# Altium PCB PCB1.PcbDoc
Units mm, origin at the board's own origin, x right, y up, seen from the top; angles counter-clockwise.
Board outline 51.75 x 40 mm, 4 copper layers (Component Side, Ground Plane, Power Plane, Solder Side), stack 0.844 mm thick; 2 components, 70 nets, 124 pads, 2 vias.
Unrouted connection lines stored in the file: 22.
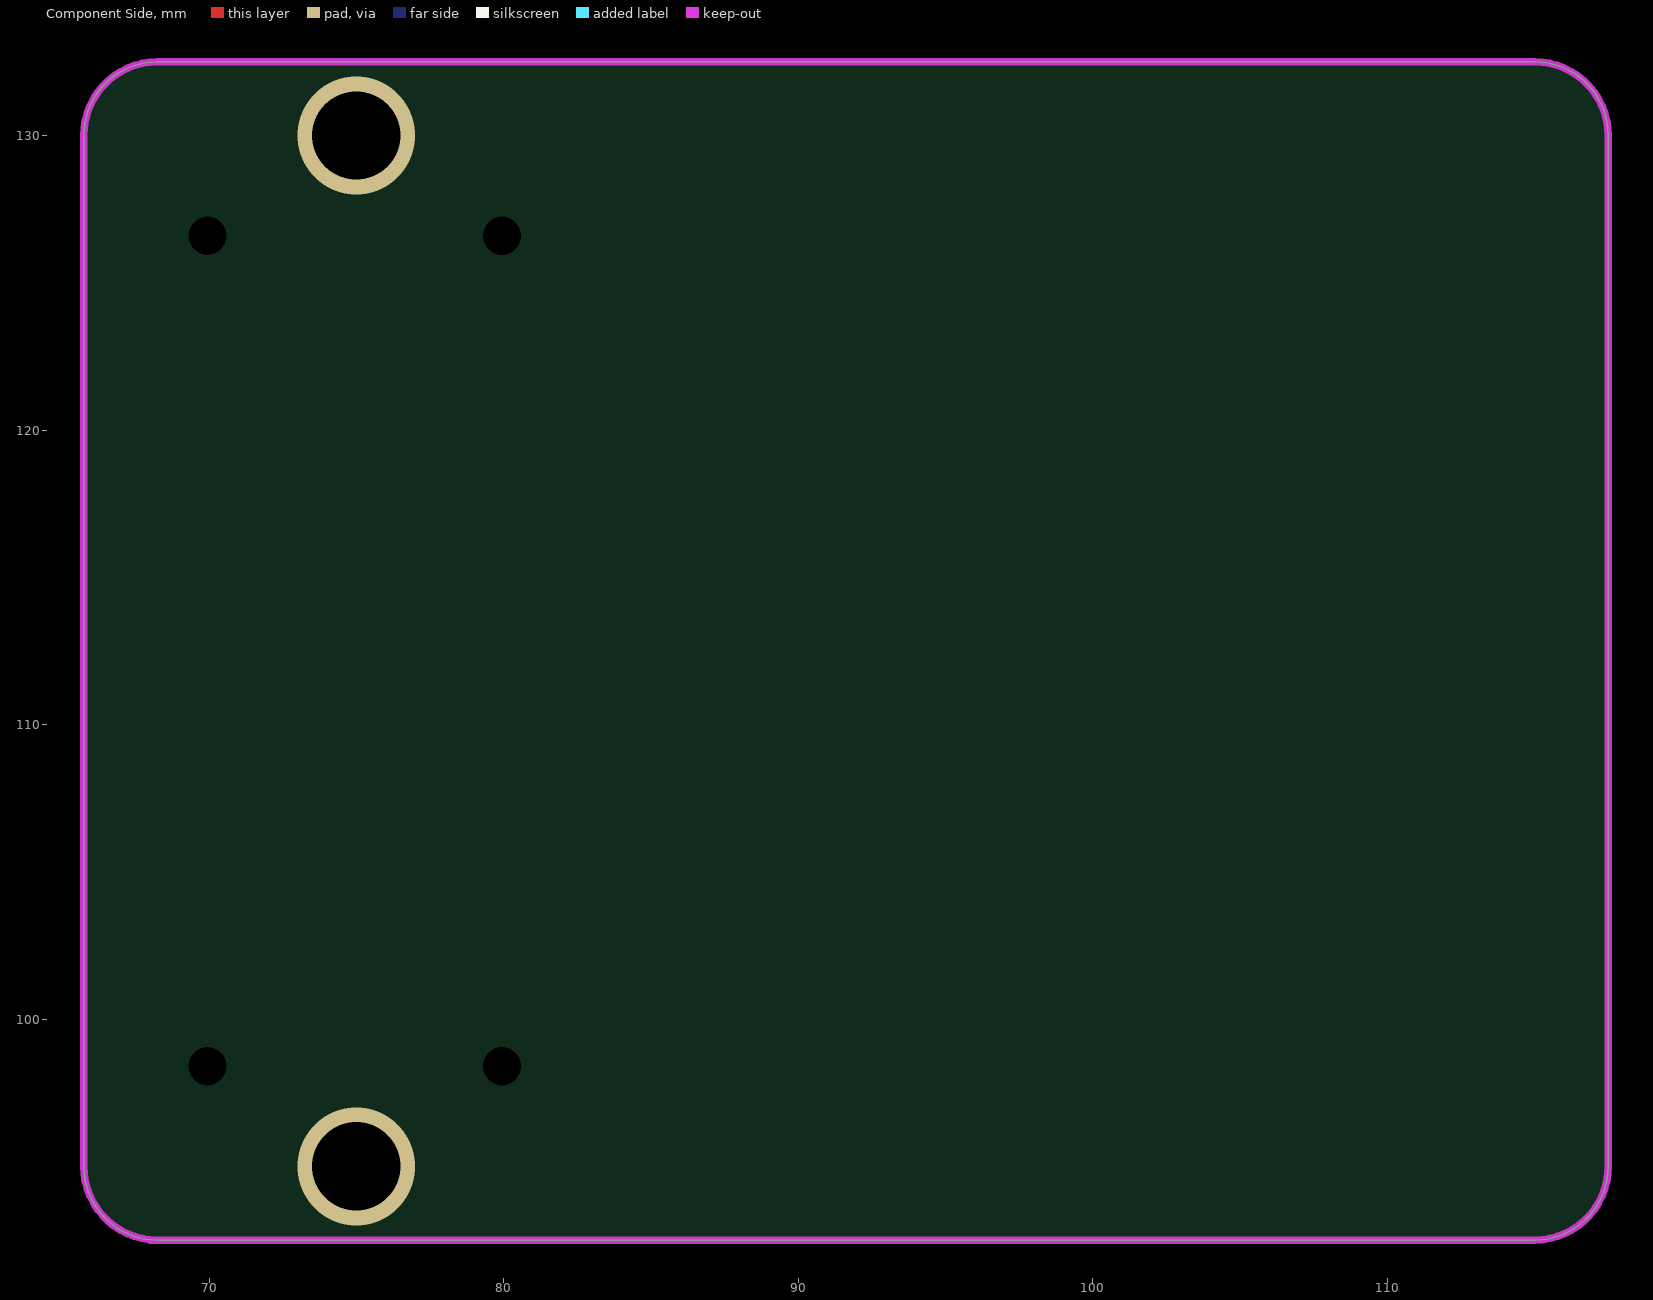
[diagram p0: Component Side view]
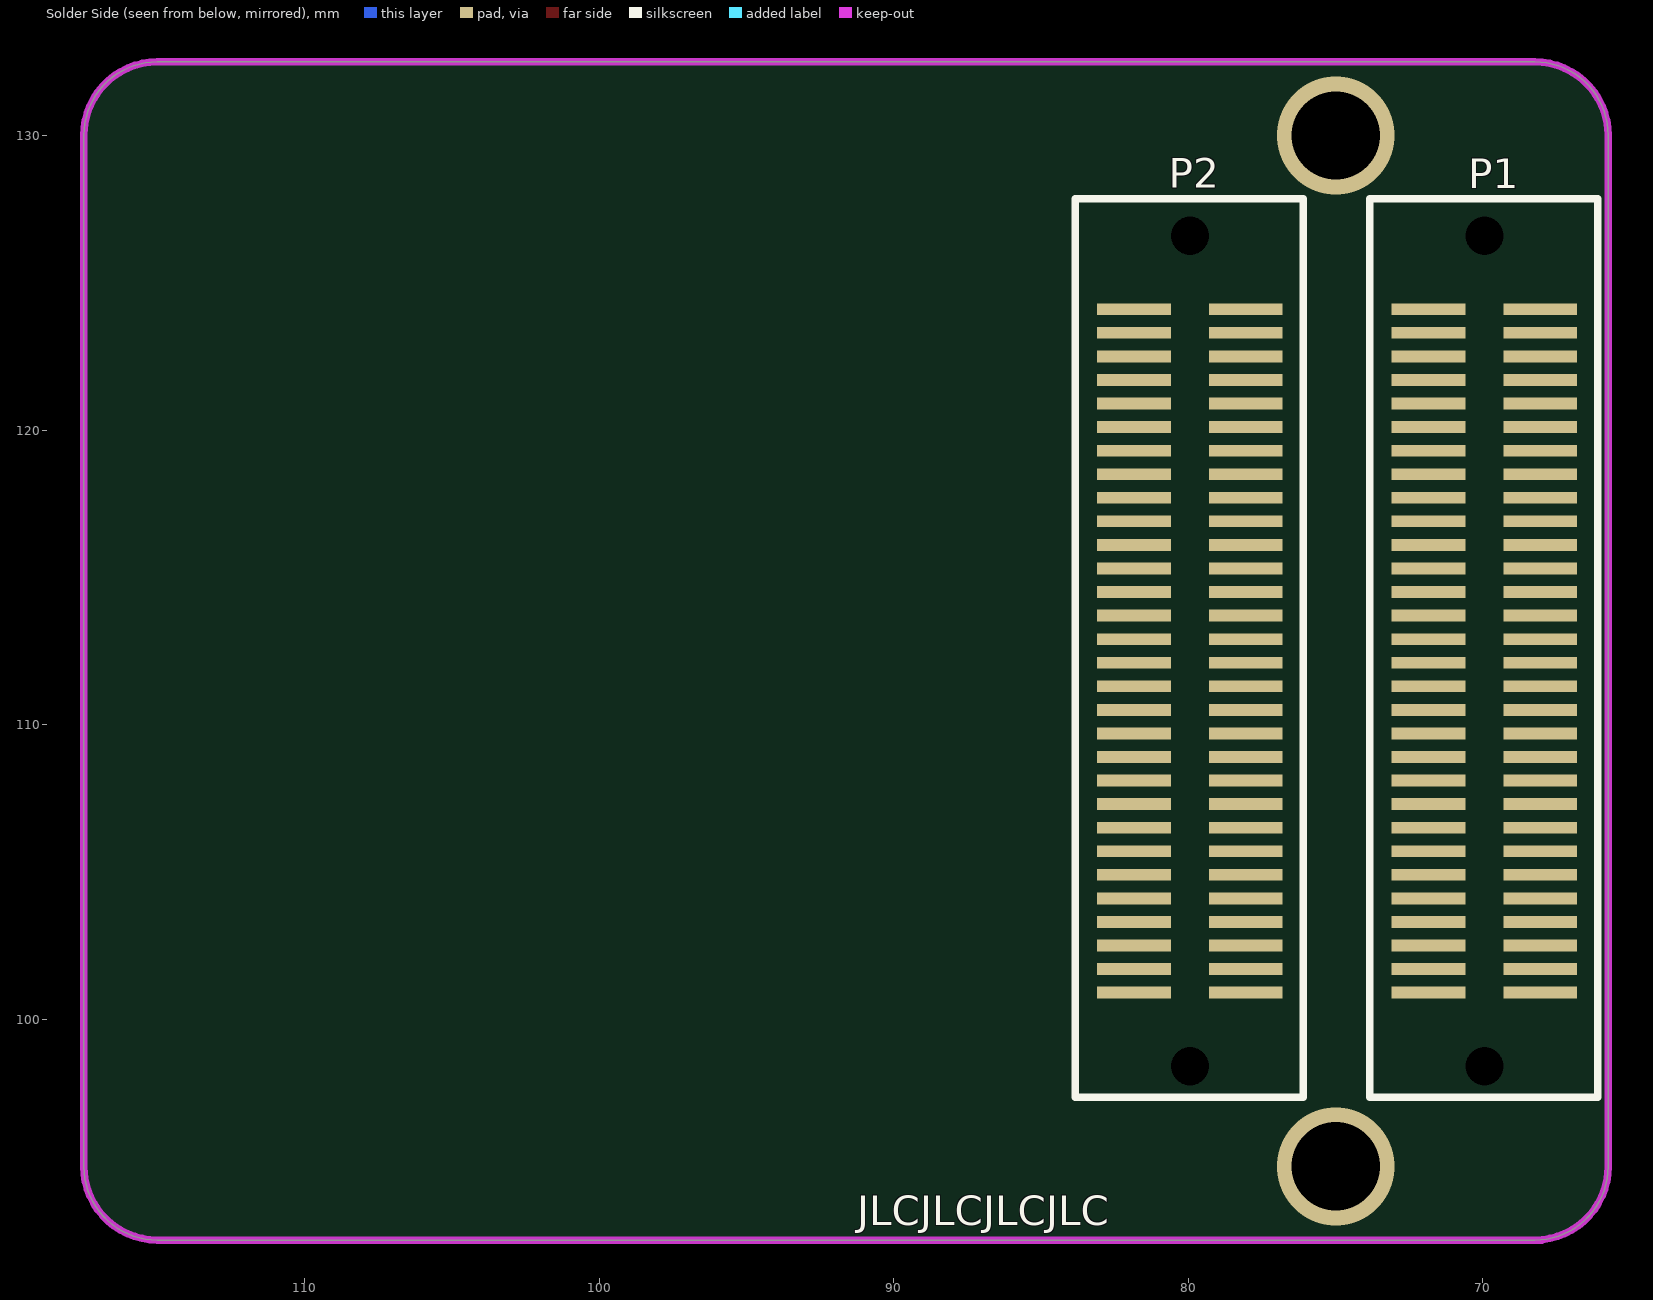
[diagram p1: Solder Side view, seen from below]
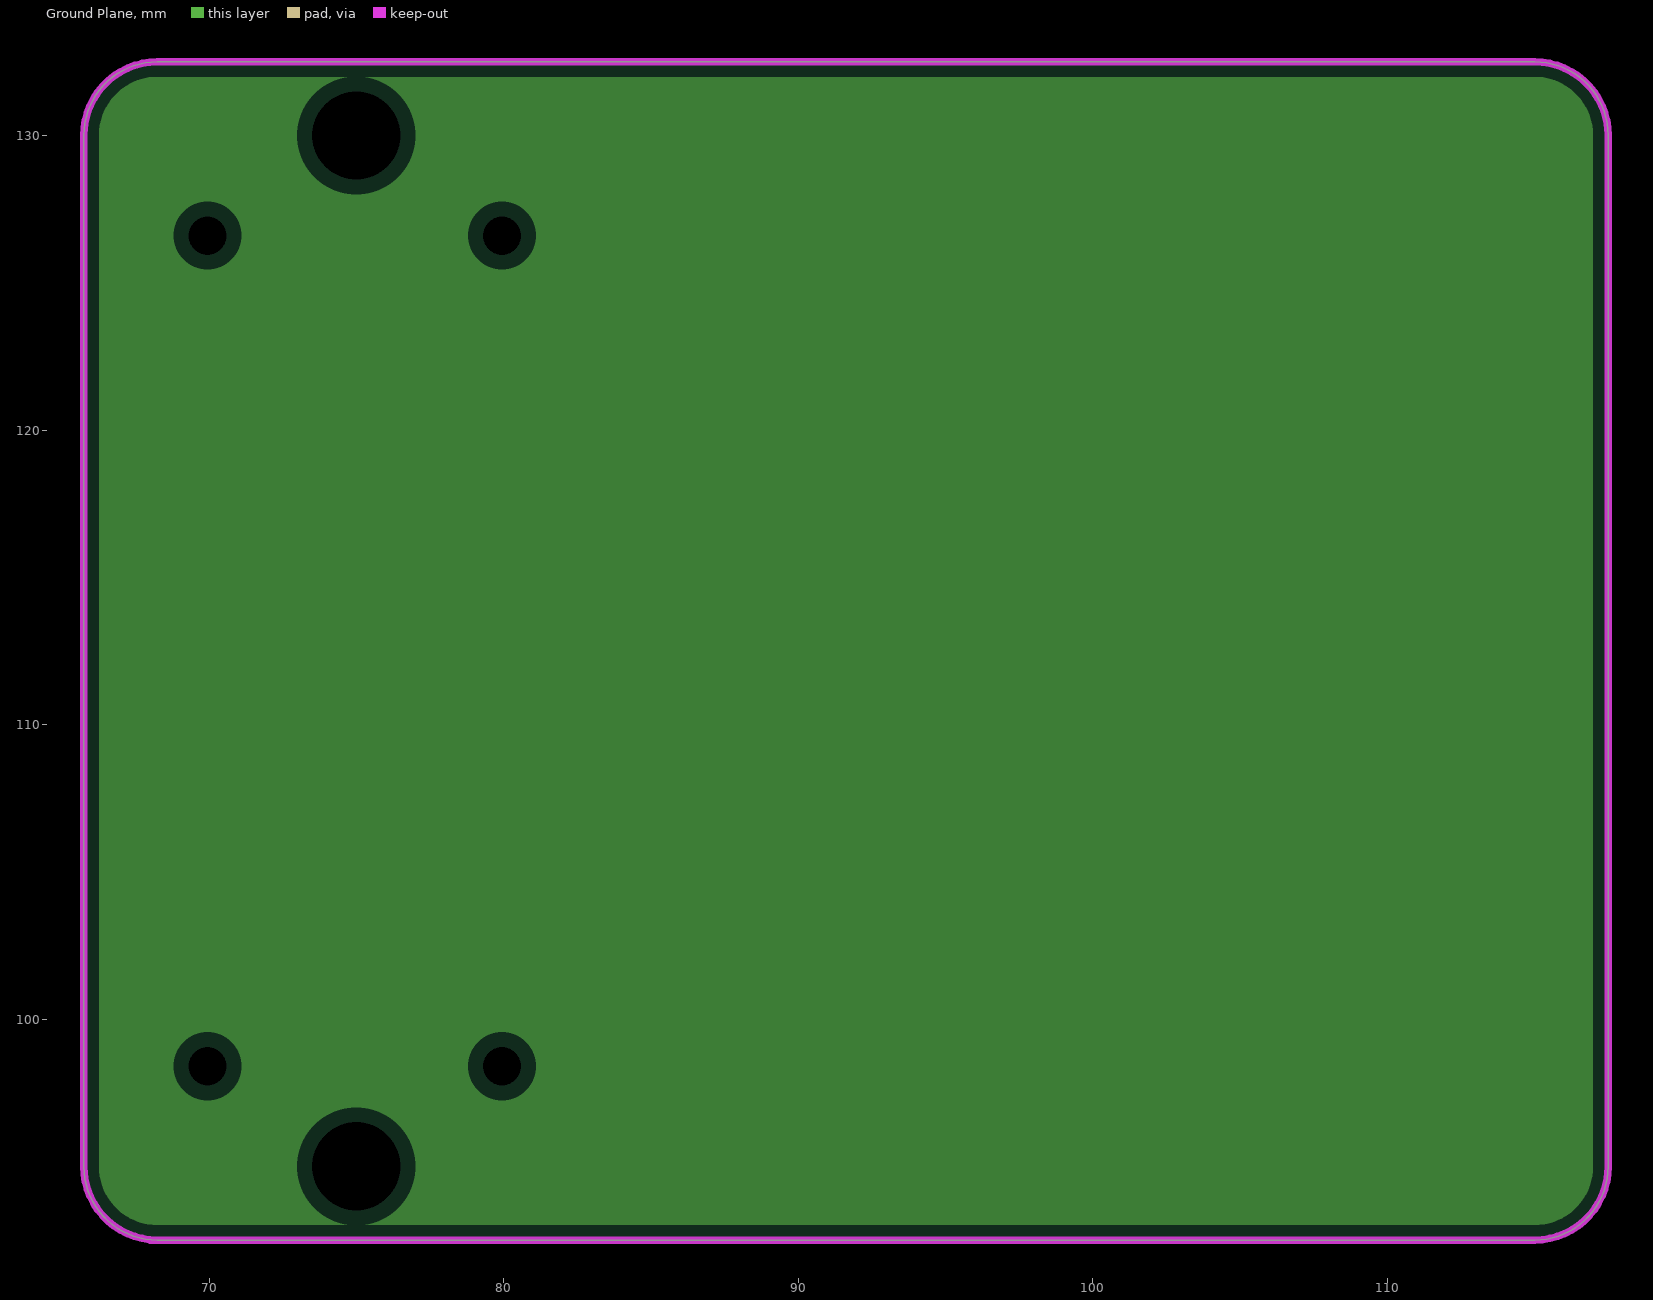
[diagram p2: Ground Plane, clearances drawn from the general rule]
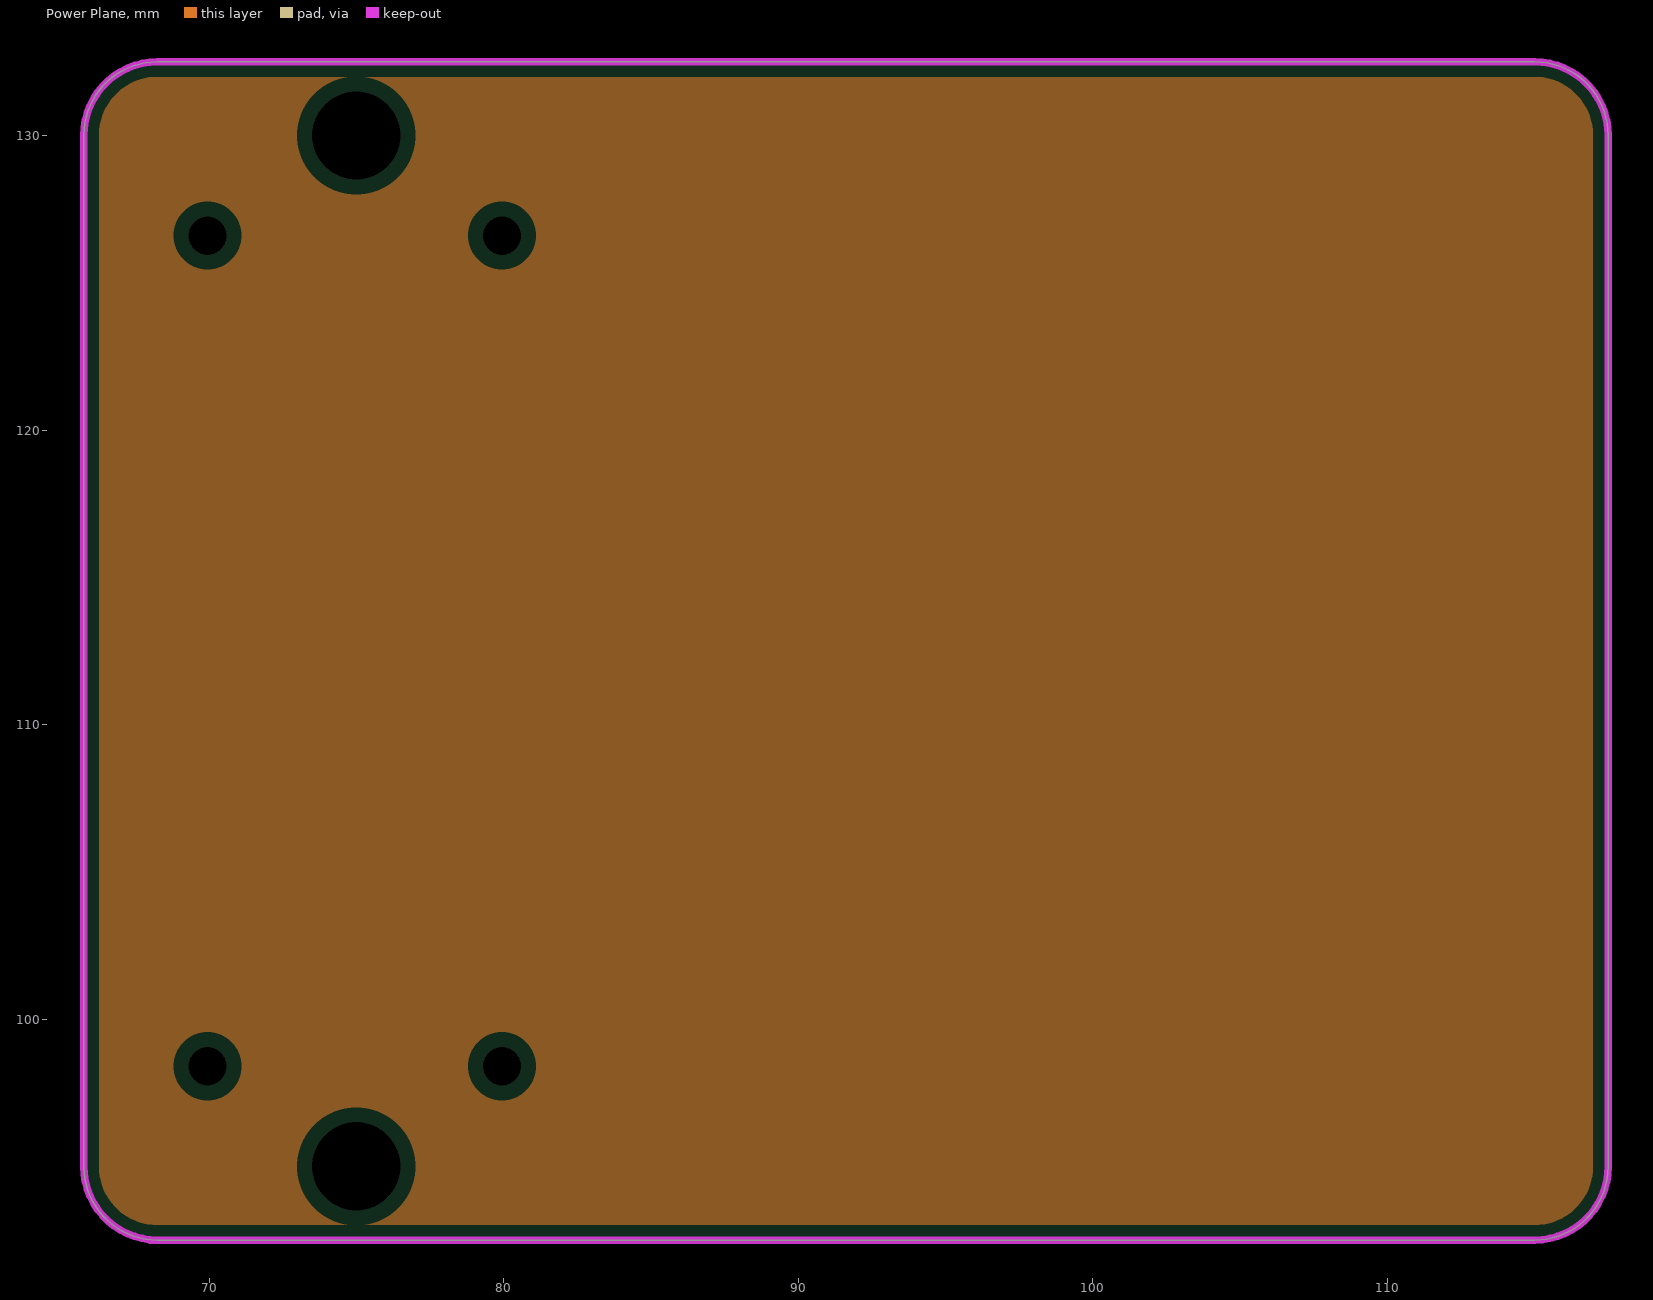
[diagram p3: Power Plane, clearances drawn from the general rule]

## Layer stack, top to bottom
Top Solder: solder mask 0.0102, Solder Resist, Dk 3.5
Component Side: signal copper 0.0356
Dielectric 1: core 0.32, FR-4, Dk 4.8
Ground Plane: plane copper 0.036
Dielectric 3: prepreg 0.127, Dk 4.2
Power Plane: plane copper 0.036
Dielectric 4: core 0.254, Dk 4.2
Solder Side: signal copper 0.0356
Bottom Solder: solder mask 0.0102, Solder Resist, Dk 3.5

## Board outline
68.25,92.5 cw(c68.25,95) 65.75,95 65.75,130 cw(c68.25,130) 68.25,132.5 115,132.5 cw(c115,130) 117.5,130 117.5,95 cw(c115,95) 115,92.5

## Design rules (kind name [scope] priority, off if disabled: settings)
Clearance [All] p1: gap=0.2
Length Length_1 [InNetClass('Class2')] p1: maxlimit=31 minlimit=30
Length [InNetClass('Class1')] p2: maxlimit=11 minlimit=10
PlaneClearance [All] p1: clearance=0.508
PlaneConnect [All] p1: planeconnectstyle=Relief reliefexpansion=0.508 reliefentries=4 reliefconductorwidth=0.254 reliefairgap=0.254
PolygonConnect [All] p1: connectstyle=Relief reliefconductorwidth=0.254 reliefentries=4 polygonreliefangle="90 Angle" airgapwidth=0.254
RoutingVias [All] p1: holewidth=0.3 width=0.6 viastyle="Through Hole" minholewidth=0.3 minwidth=0.6 maxholewidth=0.711 maxwidth=1.27
SolderMaskExpansion [All] p1: expansion=0.102
Width [All] p1: maxlimit=200 minlimit=0.2 preferedwidth=0.254
28 further rules are at their usual default settings.

## Components (designator, comment, footprint, x,y, rotation, side; value= is the part's Value field where it differs from the comment)
P1 "BTB" BTBCON_0.8mm_60P 71.85,124.1 r180 bottom locked
P2 "BTB" BTBCON_0.8mm_60P 81.85,124.1 r180 bottom locked

## Footprints (in the part's own frame and the unit in brackets; to place one, negate y for a bottom-side part, rotate by r counter-clockwise, add the part's x,y. Pads: shape width x height; smd on the part's side, far side on the other; paste and mask are expansions set on the pad)
BTBCON_0.8mm_60P [mm]
  rect 2.5x0.4 smd: 1(0,0) 2(3.8,0) 3(0,-0.8) 4(3.8,-0.8) 5(0,-1.6) 6(3.8,-1.6) 7(0,-2.4) 8(3.8,-2.4) 9(0,-3.2) 10(3.8,-3.2) 11(0,-4) 12(3.8,-4) 13(0,-4.8) 14(3.8,-4.8) 15(0,-5.6) 16(3.8,-5.6) 17(0,-6.4) 18(3.8,-6.4) 19(0,-7.2) 20(3.8,-7.2) 21(0,-8) 22(3.8,-8) 23(0,-8.8) 24(3.8,-8.8) 25(0,-9.6) 26(3.8,-9.6) 27(0,-10.4) 28(3.8,-10.4) 29(0,-11.2) 30(3.8,-11.2) 31(0,-12) 32(3.8,-12) 33(0,-12.8) 34(3.8,-12.8) 35(0,-13.6) 36(3.8,-13.6) 37(0,-14.4) 38(3.8,-14.4) 39(0,-15.2) 40(3.8,-15.2) 41(0,-16) 42(3.8,-16) 43(0,-16.8) 44(3.8,-16.8) 45(0,-17.6) 46(3.8,-17.6) 47(0,-18.4) 48(3.8,-18.4) 49(0,-19.2) 50(3.8,-19.2) 51(0,-20) 52(3.8,-20) 53(0,-20.8) 54(3.8,-20.8) 55(0,-21.6) 56(3.8,-21.6) 57(0,-22.4) 58(3.8,-22.4) 59(0,-23.2) 60(3.8,-23.2)
  round 1 hole 1.3: 61(1.9,2.5) 62(1.9,-25.7)
  silkscreen extent -2,-26.75 5.75,3.75

## Part data
P1 P2: library part "Header 30X2", "Header, 30-Pin, Dual row"

## Via types
v1: diameter 4, hole 3, Component Side to Solder Side, 2 vias

## Nets (pads, with @x,y where several pads share a name; then routed paths per layer and width w, separated by ;. In a path a pad name is that pad's centre, name@x,y a point inside that pad or via, vN(x,y) a via of type N, cw(c..) or ccw(c..) an arc to the next point about the centre after c; other vN are vias at no path point)
1V8: 
3V3: 
5V: P1.1 P1.2 P2.1 P2.2
A12: P2.46
A13: P2.44
A14: P2.39
A15: P2.37
A16: P2.18
A17: P2.16
B13: P2.45
B14: P2.43
B15: P2.36
B16: P2.34
C12: P2.40
C13: P2.38
C16: P2.32
C17: P2.28
D0: 
D1: 
D2: 
D3: 
D4: 
D5: 
D6: 
D7: 
D14: P2.50
D15: P2.48
D16: P2.30
D17: P2.26
E14: P2.31
E15: P2.29
E17: P2.14
E18: P2.12
F13: P2.54
F15: P2.22
F16: P2.35
F17: P2.33
F18: P2.13
G14: P2.52
G15: P2.20
G16: P2.10
G18: P2.11
G19: P2.9
GND: P1.3 P1.4 P1.5 P1.6 P1.23 P1.24 P1.41 P1.42 P1.59 P1.60 P2.3 P2.4 P2.5 P2.6 P2.23 P2.24 P2.41 P2.42 P2.59 P2.60
H16: P2.8
H17: P2.21
H18: P2.19
H19: P2.7
HS: 
J15: P2.58
J16: P2.56
J17: P2.17
K15: P2.57
K17: P2.15
K18: P2.53
K19: P2.51
K20: P2.49
L15: P2.55
L16: P2.27
L17: P2.25
L20: P2.47
NetC1_2: 
NetD1_2: 
NetD2_2: 
NetR1_2: 
PCK: 
SCK: 
SDA: 
VS: 
XCK: 
pads on no net: P1.7 P1.8 P1.9 P1.10 P1.11 P1.12 P1.13 P1.14 P1.15 P1.16 P1.17 P1.18 P1.19 P1.20 P1.21 P1.22 P1.25 P1.26 P1.27 P1.28 P1.29 P1.30 P1.31 P1.32 P1.33 P1.34 P1.35 P1.36 P1.37 P1.38 P1.39 P1.40 P1.43 P1.44 P1.45 P1.46 P1.47 P1.48 P1.49 P1.50 P1.51 P1.52 P1.53 P1.54 P1.55 P1.56 P1.57 P1.58 P1.61 P1.62 P2.61 P2.62
copper on no net:
  other v1: 75,95 75,130

## Polygon pours and split planes (outlines as drawn)
no net on Ground Plane (split plane): 115.195,131.982 115.389,131.954 115.578,131.906 115.762,131.84 115.939,131.757 116.107,131.656 116.264,131.54 116.408,131.408 116.54,131.264 116.656,131.107 116.757,130.939 116.84,130.762 116.906,130.578 116.954,130.389 116.982,130.195 116.991,130.016 116.99,130 116.99,95 116.991,94.984 116.982,94.805 116.954,94.611 116.906,94.422 116.84,94.238 116.757,94.061 116.656,93.893 116.54,93.736 116.408,93.592 116.264,93.46 116.107,93.344 115.939,93.243 115.762,93.16 115.578,93.094 115.389,93.046 115.195,93.018 115.016,93.009 115,93.01 68.25,93.01 68.234,93.009 68.055,93.018 67.861,93.046 67.672,93.094 67.488,93.16 67.311,93.243 67.143,93.344 66.986,93.46 66.842,93.592 66.71,93.736 66.594,93.893 66.493,94.061 66.41,94.238 66.344,94.422 66.296,94.611 66.268,94.805 66.259,94.984 66.26,95 66.26,130 66.259,130.016 66.268,130.195 66.296,130.389 66.344,130.578 66.41,130.762 66.493,130.939 66.594,131.107 66.71,131.264 66.842,131.408 66.986,131.54 67.143,131.656 67.311,131.757 67.488,131.84 67.672,131.906 67.861,131.954 68.055,131.982 68.234,131.991 68.25,131.99 115,131.99 115.016,131.991
no net on Power Plane (split plane): 115.195,131.982 115.389,131.954 115.578,131.906 115.762,131.84 115.939,131.757 116.107,131.656 116.264,131.54 116.408,131.408 116.54,131.264 116.656,131.107 116.757,130.939 116.84,130.762 116.906,130.578 116.954,130.389 116.982,130.195 116.991,130.016 116.99,130 116.99,95 116.991,94.984 116.982,94.805 116.954,94.611 116.906,94.422 116.84,94.238 116.757,94.061 116.656,93.893 116.54,93.736 116.408,93.592 116.264,93.46 116.107,93.344 115.939,93.243 115.762,93.16 115.578,93.094 115.389,93.046 115.195,93.018 115.016,93.009 115,93.01 68.25,93.01 68.234,93.009 68.055,93.018 67.861,93.046 67.672,93.094 67.488,93.16 67.311,93.243 67.143,93.344 66.986,93.46 66.842,93.592 66.71,93.736 66.594,93.893 66.493,94.061 66.41,94.238 66.344,94.422 66.296,94.611 66.268,94.805 66.259,94.984 66.26,95 66.26,130 66.259,130.016 66.268,130.195 66.296,130.389 66.344,130.578 66.41,130.762 66.493,130.939 66.594,131.107 66.71,131.264 66.842,131.408 66.986,131.54 67.143,131.656 67.311,131.757 67.488,131.84 67.672,131.906 67.861,131.954 68.055,131.982 68.234,131.991 68.25,131.99 115,131.99 115.016,131.991

## Keep-outs
Keep-Out Layer:
  lines w0.254: 68,92.5 115,92.5 ccw(c115,95) 117.5,95 117.5,130 ccw(c115,130) 115,132.5 68.25,132.5 ccw(c68.25,130) 65.75,130 65.75,95 ccw(c68.25,95) 68.25,92.5

## Silkscreen, mask and mechanical layers (free items; w line width, h text height)
Bottom Overlay:
  text "JLCJLCJLCJLC" at 91.25,93 h1
Mechanical 1:
  lines w0.254: 65.75,95 ccw(c68.25,95) 68.25,92.5 93.75,92.5 115,92.5 ccw(c115,95) 117.5,95 117.5,130 ccw(c115,130) 115,132.5 94.75,132.5 68.25,132.5 ccw(c68.25,130) 65.75,130 65.75,95